# Altium PCB LedDimming_IR_Horizontal_Tail_BothSize.PcbDoc
Units mm, origin at the board's own origin, x right, y up, seen from the top; angles counter-clockwise.
Board outline 28.32 x 10.16 mm, 2 copper layers (Top Layer, Bottom Layer); 25 components, 20 nets, 63 pads, 8 vias.
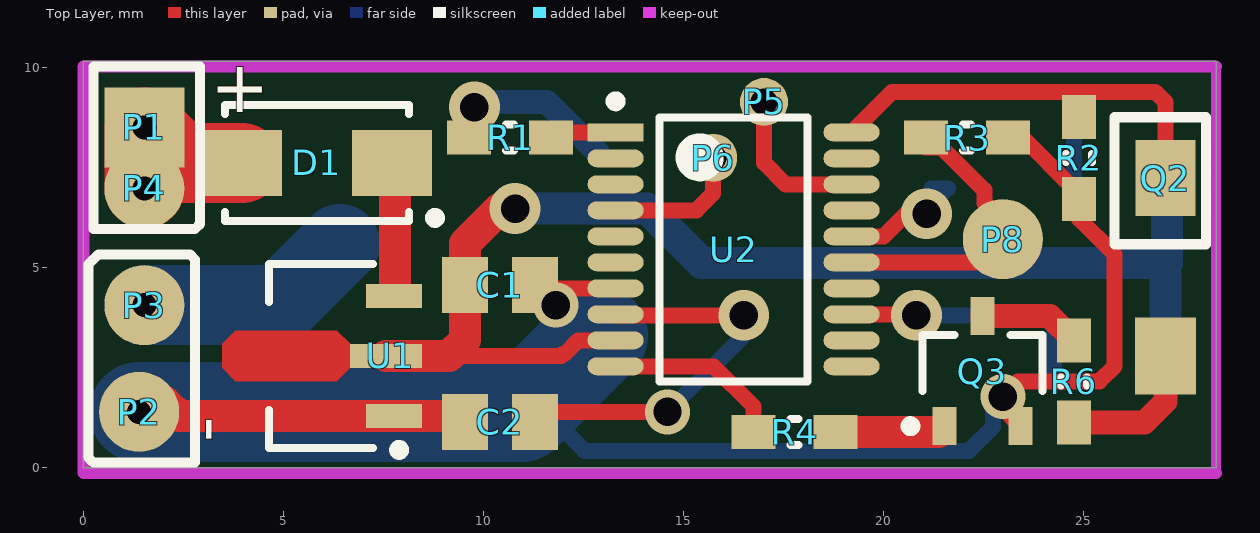
[diagram p0: Top Layer view]
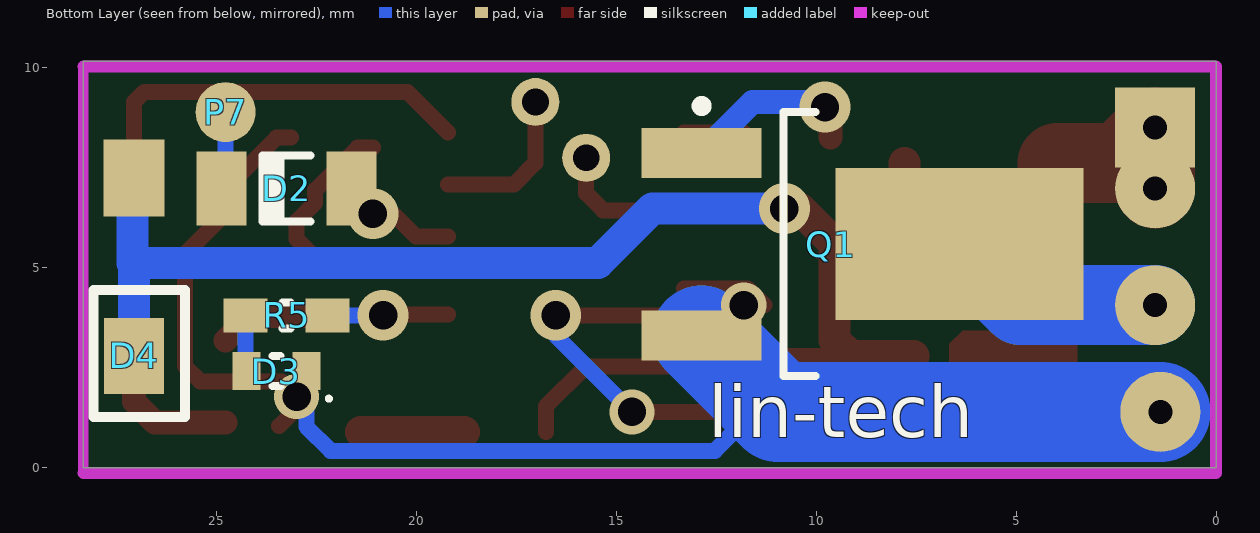
[diagram p1: Bottom Layer view, seen from below]

## Layer stack, top to bottom
Top Solder: solder mask 0.0102, Solder Resist, Dk 3.5
Top Layer: signal copper 0.0356
Dielectric 1: dielectric 0.32, FR-4, Dk 4.8
Bottom Layer: signal copper 0.0356
Bottom Solder: solder mask 0.0102, Solder Resist, Dk 3.5

## Board outline
0,0 28.321,0 28.321,10.16 0,10.16

## Design rules (kind name [scope] priority, off if disabled: settings)
Clearance [All] p1: gap=0.2 ignorepadtopadclearanceinfootprint=FALSE
PolygonConnect [All] p1: connectstyle=Relief reliefconductorwidth=0.254 reliefentries=4 polygonreliefangle="90 Angle" airgapwidth=0.254
RoutingVias [All] p1: holewidth=0.4 width=8 viastyle="Through Hole" minholewidth=0.711 minwidth=1.27 maxholewidth=0.711 maxwidth=1.27
SolderMaskExpansion [All] p1: expansion=0.102
Width [All] p1: maxlimit=4 minlimit=0.4 preferedwidth=0.5
30 further rules are at their usual default settings.

## Classes and differential pairs
component class LedDimming: C1 C2 D1 D2 D3 P1 P2 P3 P4 P5 P6 P7 P8 Q1 Q3 R1 R2 R3 R4 R5 R6 U1 U2

## Components (designator, comment, footprint, x,y, rotation, side; value= is the part's Value field where it differs from the comment)
C1 "106" CAPC2012X12N 10.414,4.572 r180 top
C2 "104" CAPC2012X12N 10.414,1.143 r0 top
D1 "1N4007" SODFL504X244-2N 5.842,7.62 r180 top
D2 "1N4148" DIOMELF3515N 23.241,6.985 r180 bottom
D3 "LED0603" DIOC1608X06N 23.495,2.413 r0 bottom
D4 "Comment" LED_IR_3mm-SMD-Both_Layer 27.051,2.794 r0 bottom
P1 "P" Point#1 1.524,8.509 r0 top
P2 "P" Point#2 1.397,1.397 r0 top
P3 "P" Point#2 1.524,4.064 r0 top
P4 "P" Point#2 1.524,6.985 r0 top
P5 "P" Point#3 17.018,9.144 r0 top
P6 "P" Point#3 15.748,7.747 r0 top
P7 "P" Point#4 24.765,8.89 r180 bottom
P8 "P" Point#5 22.987,5.715 r0 top
Q1 "AOD424" DPAK228P991X229-3N_TO252 8.763,5.588 r180 bottom
Q2 "Comment" LED_IR_3mm-SMD-Both_Layer 27.051,7.239 r0 top
Q3 "C1815" SOT95P278X125-3N 22.479,2.413 r90 top
R1 "470R" RESC2608X06N_0603 10.668,8.255 r0 top
R2 "10K" RESC2608X06N_0603 24.892,7.747 r90 top
R3 "10K" RESC2608X06N_0603 22.098,8.255 r180 top
R4 "1K" RESC2608X06N_0603 17.78,0.889 r0 top
R5 "1K" RESC2608X06N_0603 23.241,3.81 r180 bottom
R6 "330R" RESC2608X06N_0603 24.765,2.159 r270 top
U1 "CJA1117B-5.0 SOT89" SOT89-150P409X160-3N 5.969,2.794 r180 top
U2 "STM8S003" TSOP65P640X120-20N 16.256,5.461 r0 top value=STM8S003F3

## Footprints (in the part's own frame and the unit in brackets; to place one, negate y for a bottom-side part, rotate by r counter-clockwise, add the part's x,y. Pads: shape width x height; smd on the part's side, far side on the other; paste and mask are expansions set on the pad)
CAPC2012X12N [mm] "Chip Capacitor, 2-Leads, Body 2.00x1.25mm, IPC Medium Density"
  rect 1.15x1.4 smd: 1(-0.875,0) 2(0.875,0)
  body extent -1.1,-0.67 1.1,0.67, height 1.2
DIOC1608X06N [mm] "Chip Diode, 2-Leads, Body 1.60x0.80mm, IPC Medium Density"
  rect 0.7x0.95 smd: 1(-0.75,0) 2(0.75,0)
  silkscreen extent -1.36,-0.38 0.1,0.74, body extent -0.9,-0.4 0.9,0.4, height 0.6
DIOMELF3515N [mm] "MELF Diode, 2-Leads, Body 3.50x1.55mm, IPC Medium Density"
  rect 1.25x1.85 smd: 1(-1.625,0) 2(1.625,0)
  silkscreen extent -0.6,-0.83 0.6,0.82, body extent -1.85,-0.85 1.85,0.85, height 1.69
DPAK228P991X229-3N_TO252 [mm] "D-PAK, 3-Pads, Body 6.15x6.65mm (max), IPC Medium Density"
  rect 3x1.25 smd: 1(-4.1,2.28) 3(-4.1,-2.28)
  rect 6.2x3.8 smd: 4(2.35,0)
  silkscreen extent -4.23,-3.3 -1.25,3.58, body extent -2.05,-3.3 4.05,3.3, height 2.29
LED_IR_3mm-SMD-Both_Layer [mm] "IR Transmitter and Receiver Led"
  rect 1.524x1.924 smd far side: 1(0,0)
  rect 1.5x1.9 smd: 2(0,0)
  silkscreen extent -1.27,-1.65 1.02,1.52, body extent -1.75,-1.9 6.75,1.9, height 1.6
Point#1 [mm]
  rect 2x2 hole 0.6: 1(0,0)
Point#2 [mm]
  round 2 hole 0.6: 1(0,0)
Point#3 [mm]
  round 1.2 hole 0.67: 1(0,0)
Point#4 [mm]
  round 1.5 smd: 1(0,0)
Point#5 [mm]
  round 2 smd: 1(0,0)
RESC2608X06N_0603 [mm] "Chip Resistor, 2-Leads, Body 2.60x0.80mm, IPC Medium Density"
  rect 1.1x0.85 smd: 1(-1.025,0) 2(1.025,0)
  silkscreen extent -0.1,-0.33 0.1,0.33, body extent -1.3,-0.4 1.3,0.4, height 0.6
SODFL504X244-2N [mm] "SODFL, 2-Leads, Body 2.70x5.04mm, IPC Medium Density"
  rect 2x1.65 smd: 1(-1.875,0) 2(1.875,0)
  silkscreen extent -3.08,-1.45 2.3,1.5, body extent -2.3,-1.45 2.3,1.45, height 2.44
SOT89-150P409X160-3N [mm] "SOT89, 3-Leads, Body 4.50x2.45mm, Pitch 1.50mm, Lead Span 4.1mm, IPC Medium Density"
  rect 1.4x0.6 smd: 1(-1.8,1.5) 3(-1.8,-1.5)
  rect 1.8x0.6 smd: 2(-1.6,0)
  Top Layer region: -0.7,0.3 -0.365,0.635 2.165,0.635 2.5,0.3 2.5,-0.3 2.165,-0.635 -0.365,-0.635 -0.7,-0.3
  silkscreen extent -2.05,-2.3 1.32,2.47, body extent -1.28,-2.3 1.32,2.3, height 1.6
SOT95P278X125-3N [mm] "SOT23, 3-Leads, Body 2.92x2.78mm, Pitch 0.95mm, IPC Medium Density"
  rect 0.95x0.6 smd: 1(-1.375,0.95) 2(-1.375,-0.95) 3(1.375,0)
  silkscreen extent -1.5,-1.5 0.9,1.92, body extent -0.9,-1.52 0.9,1.52, height 1.25
TSOP65P640X120-20N [mm] "TSOP, 20-Leads, Body 6.50x4.40mm, Pitch 0.65mm, IPC Medium Density"
  rect 1.4x0.45 smd: 1(-2.95,2.925)
  oval 1.4x0.45 smd: 2(-2.95,2.275) 3(-2.95,1.625) 4(-2.95,0.975) 5(-2.95,0.325) 6(-2.95,-0.325) 7(-2.95,-0.975) 8(-2.95,-1.625) 9(-2.95,-2.275) 10(-2.95,-2.925) 11(2.95,-2.925) 12(2.95,-2.275) 13(2.95,-1.625) 14(2.95,-0.975) 15(2.95,-0.325) 16(2.95,0.325) 17(2.95,0.975) 18(2.95,1.625) 19(2.95,2.275) 20(2.95,2.925)
  silkscreen extent -3.07,-3.3 1.85,3.82, body extent -3.2,-3.3 3.2,3.3, height 1.2

## Part data
C1: library part "Capacitor 106"
C2: library part "Capacitor 104 0603"
D1: library part "1N4007_SMD Diode", "1N4007_SMD"
D2: library part 1N4148_SMD, "DIODE GEN PURP 75V 200MA DO213AA", Supplier Part Number 1=1N4148UR-1-ND, Supplier 1=Digi-Key
P1 P2 P3 P4 P5 P6 P7 P8: library part Point
Q1: library part "AOD424 20V N-Channel MOSFET", "AOD424 20V N-Channel MOSFET"
Q3: library part "Transitor C1815 NPN", "SOT-23 Plastic-Encapsulate Transistors"
R1: library part R470_0603_5%, "Thick Film Resistors - SMD 470 ohm 5%", Supplier Part Number 1=CR0603-JW-471ELFCT-ND, Supplier 1=Digi-Key
R2 R3: library part R10k_0603_5%, "RES SMD 10K OHM 1% 1/4W 0603", Supplier Part Number 1=541-10.0KSCT-ND, Supplier 1=Digi-Key
R4 R5: library part 1k_0603_5%, "Thick Film Resistors - SMD 0603 1kOHMS 5% 1/10WATT", Supplier Part Number 1=CR0603-JW-101ELFCT-ND, Supplier 1=Digi-Key
R6: library part R330_0603_5%, "Thick Film Resistors - SMD 330 ohm 5%", Supplier Part Number 1=CR0603-JW-471ELFCT-ND, Supplier 1=Digi-Key
U1: "CJA1117B-5.0 SOT89 Power IC 1A 5V_IC"
U2: "MCU 8-bit STM8S STM8 CISC 8KB Flash 3.3V/5V 20-Pin TSSOP T/R", Supplier Part Number 1=497-18051-1-ND

## Via types
v1: diameter 1.27, hole 0.711, Top Layer to Bottom Layer, 5 vias
v2: diameter 1.127, hole 0.71, Top Layer to Bottom Layer, 3 vias

## Nets (pads, with @x,y where several pads share a name; then routed paths per layer and width w, separated by ;. In a path a pad name is that pad's centre, name@x,y a point inside that pad or via, vN(x,y) a via of type N, cw(c..) or ccw(c..) an arc to the next point about the centre after c; other vN are vias at no path point)
D_I: P8.1 R3.2 U2.15 | length 7.3
  Top Layer w0.4: U2.15 22.408,5.136 P8.1 22.987,6.163 22.527,6.622 22.527,6.937 21.463,8.001 R3.2@21.073,8.001
D_O: D2.2 U2.16 | length 3.4
  Top Layer w0.4: U2.16 20.01,5.786 20.574,6.35 v1(21.082,6.35)
  Bottom Layer w0.4: v1(21.082,6.35) 21.082,6.451 D2.2 D2.2@21.209,6.985
D_Output: D2.1 P7.1 | length 1.9
  Bottom Layer w0.4: P7.1 24.765,7.086 D2.1
GND: C1.1 C2.1 D3.1 P2.1 Q1.3 Q3.2 R2.1 R3.1 U1.1 U2.7 | length 45.8
  Top Layer w0.4: C1.1@11.289,4.064 11.711,4.486 U2.7 U2.7@13.281,4.461 ; R3.1 23.486,8.255 R2.1@24.765,6.976 ; Q3.2 22.987,1.48 v2(22.987,1.778) 23.368,2.159 25.4,2.159 25.781,2.54 25.781,5.334 24.892,6.223 R2.1
  Top Layer w0.8: P2.1@2.032,1.651 2.389,1.294 U1.1 9.388,1.294 C2.1
  Bottom Layer w0.4: 10.952,1.397 11.557,1.397 12.531,0.423 22.14,0.423 22.745,1.028 v2@22.745,1.397
  Bottom Layer w2.5: P2.1 10.952,1.397 Q1.3
  other v2: 11.811,4.064
NetC2_2: C2.2 U2.8 | length 10.2
  Top Layer w0.4: C2.2 11.543,1.397 v2(14.605,1.397) ; U2.8 13.331,3.811 v1(16.51,3.81) v1(16.51,3.81) v1@16.129,3.81
  Bottom Layer w0.4: v2(14.605,1.397) 16.51,3.302 v1(16.51,3.81)
NetD1_1: D1.1 U1.3 | length 3.1
  Top Layer w0.8: U1.3@7.791,4.524 D1.1@7.791,7.62
NetD3_2: D3.2 R5.1 | length 1.4
  Bottom Layer w0.4: D3.2 24.266,2.434 R5.1
NetD4_1: D4.1 R6.2 | length 4.2
  Top Layer w0.6: R6.2 26.534,1.134 27.051,1.651 D4.1 D4.1@27.051,3.302
NetP3_1: P3.1 Q1.4 | length 5.5
  Bottom Layer w2: P3.1 4.889,4.064 Q1.4
NetQ1_1: Q1.1 R1.1 | length 4.5
  Top Layer w0.6: R1.1 v1@9.643,9.008
  Bottom Layer w0.6: v1(9.779,9.017) 9.779,9.144 11.587,9.144 Q1.1
NetQ2_2: Q2.2 R2.2 U2.20 | length 10.7
  Top Layer w0.4: U2.20 20.218,9.398 26.797,9.398 27.051,9.144 Q2.2 Q2.2@27.051,6.858
NetQ3_1: Q3.1 R4.2 | length 2.6
  Top Layer w0.8: R4.2 Q3.1@21.38,0.889
NetQ3_3: Q3.3 R6.1 | length 2.5
  Top Layer w0.6: Q3.3 24.161,3.788 R6.1
NetR1_2: R1.2 U2.1 | length 1.7
  Top Layer w0.4: R1.2 11.824,8.386 U2.1
NetR4_1: R4.1 U2.10 | length 4.5
  Top Layer w0.4: U2.10 15.752,2.536 16.755,1.533 R4.1
NetR5_2: R5.2 U2.13 | length 3.1
  Top Layer w0.4: U2.13 20.854,3.836 v1(20.828,3.81)
  Bottom Layer w0.4: v1(20.828,3.81) R5.2
RESET: P6.1 U2.4 | length 3.5
  Top Layer w0.4: U2.4 15.326,6.436 15.748,6.858 P6.1
SWIM: P5.1 U2.18 | length 3.9
  Top Layer w0.4: P5.1 17.018,7.62 17.552,7.086 U2.18
VCC_5V: C1.2 D4.2 Q2.1 U1.2 U2.9 | length 31
  Top Layer w0.4: 9.144,2.794 11.938,2.794 11.981,2.837 12.03,2.837 12.379,3.186 U2.9 U2.9@13.281,3.161
  Top Layer w0.8: U1.2 9.144,2.794 9.539,3.189 C1.2 9.539,5.602 10.414,6.477 v1(10.795,6.477)
  Bottom Layer w0.8: v1(10.795,6.477) 14.097,6.477 15.459,5.115 27.086,5.115 ; D4.2@27.051,3.302 27.051,5.08 27.086,5.115 ; Q2.1@27.051,6.858 27.086,6.823 27.086,5.115
VCC_12V: D1.2 P1.1 P4.1 | length 4.3
  Top Layer w2: P4.1 P1.1 2.413,7.62 D1.2
pads on no net: U2.2 U2.3 U2.5 U2.6 U2.11 U2.12 U2.14 U2.17 U2.19

## Keep-outs
Keep-Out Layer:
  lines w0.254: 28.321,-0.127 28.321,10.033
  lines w0.3: 28.321,-0.127 0,-0.127 0,10.033 28.321,10.033

## Silkscreen, mask and mechanical layers (free items; w line width, h text height)
Top Overlay:
  lines w0.254: 0.127,0.254 0.254,0.127 2.794,0.127 2.794,5.207 2.667,5.334 0.381,5.334 0.127,5.08 0.127,0.889 0.127,0.254 ; 0.254,5.969 0.254,10.033 2.921,10.033 2.921,6.096 2.794,5.969 0.254,5.969
  text "+" at 3.175,8.89 h1.3
  text "-" at 2.667,1.27 h1.3 r270
Bottom Overlay:
  text "lin-tech" at 12.7,0.762 h1.3
Bottom Solder:
  lines w1.5: 2.667,0.889 5.207,0.889 11.176,0.889 12.7,2.413 12.7,3.048

## Dimensions
0,-0.127 to 0,10.033 on Mechanical 1